# Altium PCB FS.PcbDoc
Units mil, origin at the board's own origin, x right, y up, seen from the top; angles counter-clockwise.
Board outline 4474 x 2728.38 mil, 2 copper layers (Top Layer, Bottom Layer); 32 components, 41 nets, 175 pads, 43 vias.
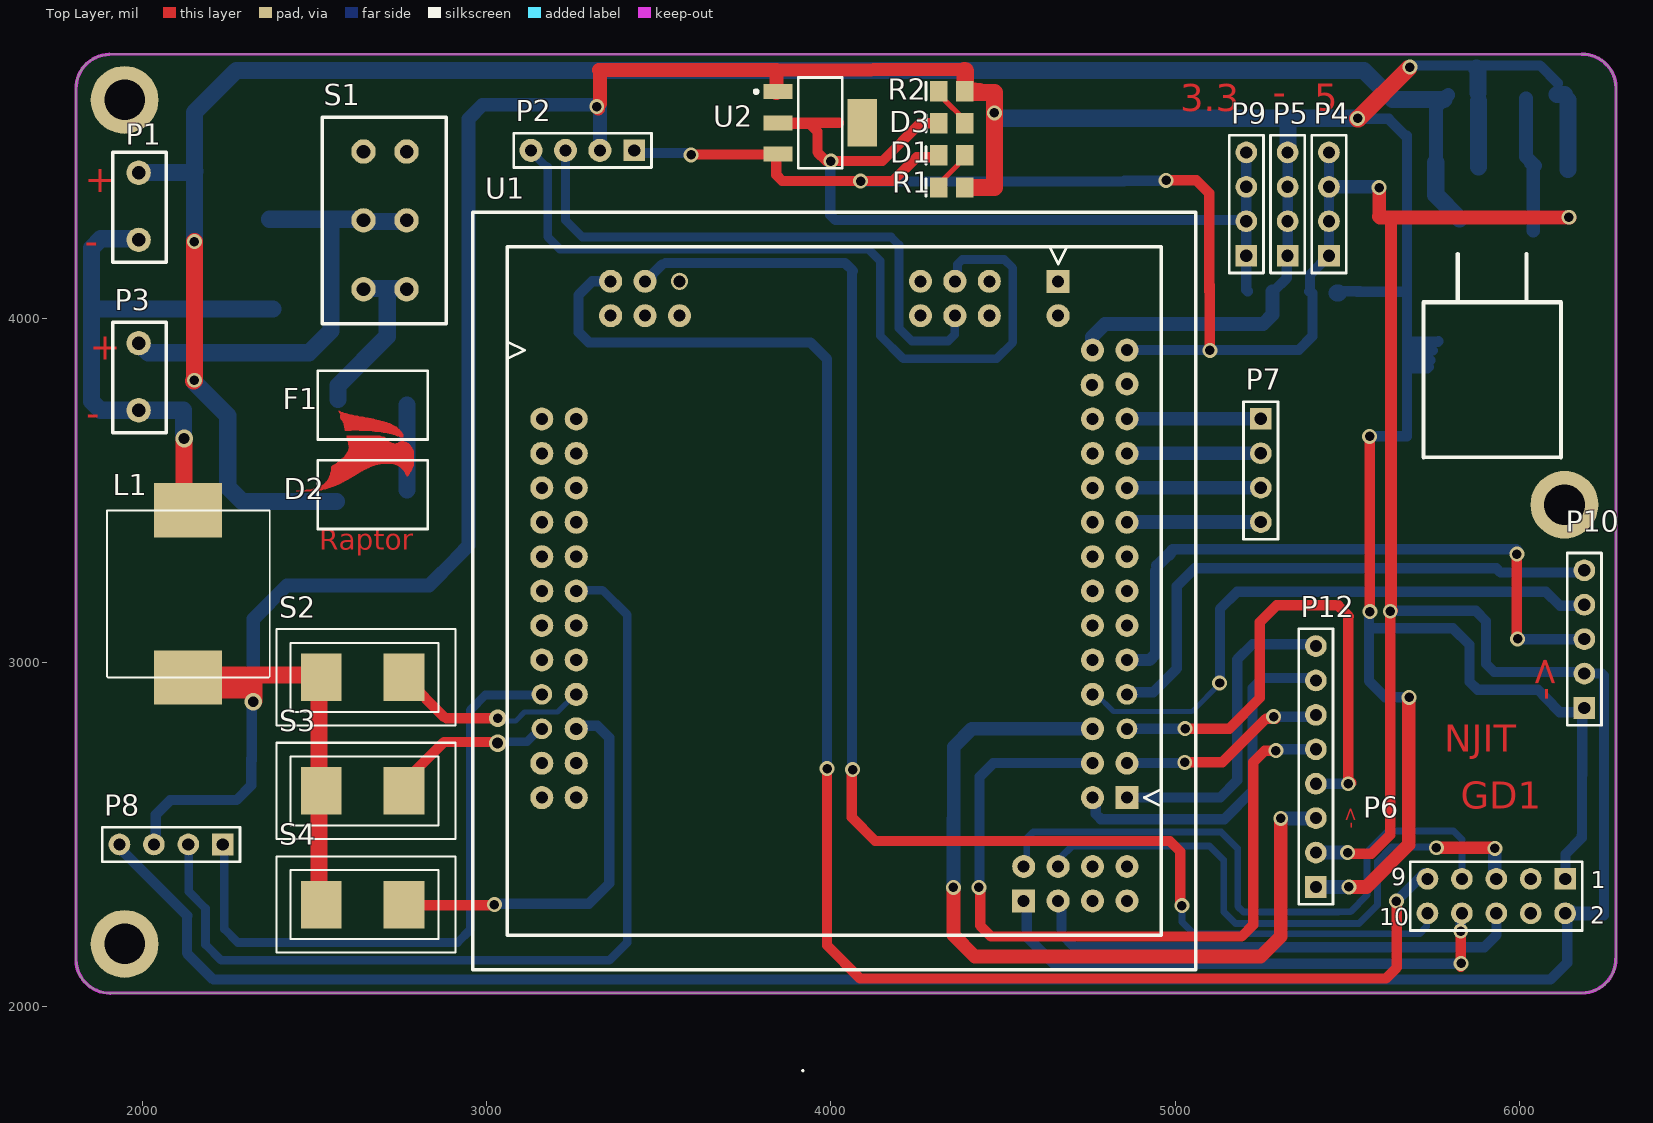
[diagram p0: Top Layer view]
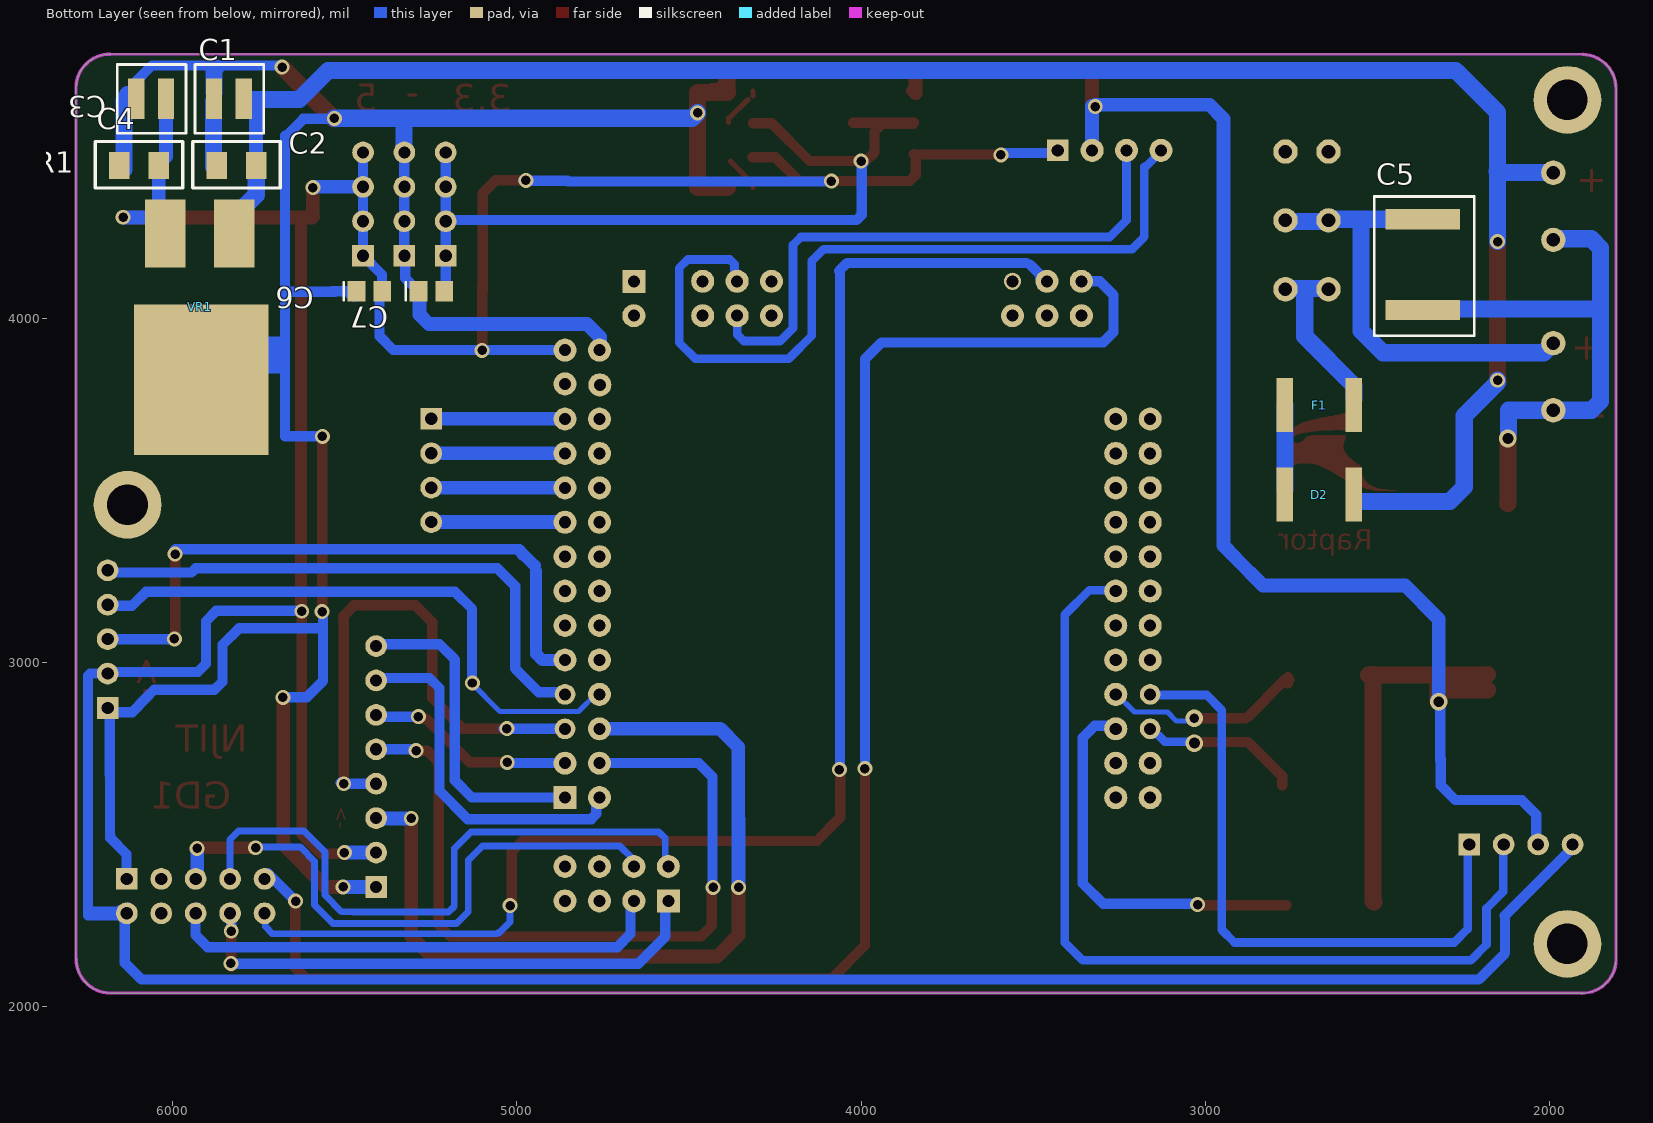
[diagram p1: Bottom Layer view, seen from below]

## Layer stack, top to bottom
Top Layer: signal copper 1.4
Dielectric: dielectric 12.6, FR-4, Dk 4.8
Bottom Layer: signal copper 1.4

## Board outline
1906.71,2040 cw(c1905.21,2138.5) 1806.71,2137 1806.71,4668 1806.71,4667.03 cw(c1905.21,4668.53) 1903.71,4767.03 6180.71,4768.38 6180.71,4768 cw(c6182.21,4669.5) 6280.71,4671 6280.71,2140.41 6280,2140.41 cw(c6181.5,2138.91) 6183,2040.41

## Design rules (kind name [scope] priority, off if disabled: settings)
Clearance [All] p1: gap=10
ComponentClearance [All] p1: gap=10 collisioncheckmode=3 verticalgap=0
PolygonConnect [All] p1: connectstyle=Relief reliefconductorwidth=10 reliefentries=4 polygonreliefangle="90 Angle"
RoutingVias [All] p1: holewidth=28 width=50 viastyle="Through Hole" minholewidth=28 minwidth=50 maxholewidth=28 maxwidth=50
SolderMaskExpansion [All] p1: expansion=4
TestPointUsage [All] p1: valid=0 allowmultiple=FALSE
Testpoint [All] p1: side=15 testpointundercomponent=TRUE minsize=40 maxsize=100 preferedsize=60 minholesize=0 maxholesize=40 preferedholesize=32 testpointgrid=1 style=1023 order=0123456789
Width [All] p1: maxlimit=100 minlimit=10 preferedwidth=40
18 further rules are at their usual default settings.

## Components (designator, comment, footprint, x,y, rotation, side; value= is the part's Value field where it differs from the comment)
C1 "Cap" 22uF钽电容 5835,4638 r180 bottom
C2 "Cap" 4.7UF钽电容 5872,4444 r180 bottom
C3 "Cap" 22uF钽电容 6061,4638 r180 bottom
C4 "Cap" 4.7UF钽电容 6155,4444 r180 bottom
C5 "Cap" 47UF钽电容 2368.71,4024.63 r90 bottom
C6 "Cap" C0805 5428.31,4079.41 r180 bottom
C7 "Cap" C0805 5248.31,4079.41 r180 bottom
D1 "LED0" C0805 4351.12,4473.75 r0 top
D2 "2A 60V" FUSE 2768.71,3488.41 r180 top
D3 "LED0" C0805 4351.12,4567.08 r0 top
F1 "Fuse 1" FUSE 2568.71,3748.41 r0 top
L1 "Inductor" 100uH 2370,3242 r270 top
P1 "Header 2H" 端子 1988.71,4318.41 r90 top
P2 "Header 4" HDR1X4#1 3428.71,4488.41 r180 top
P3 "Header 2H" 端子 1988.71,3823.41 r90 top
P4 "Header 4" HDR1X4#2 5446.71,4182.41 r90 top
P5 "Header 4" HDR1X4#2 5326.71,4182.41 r90 top
P6 "Header 5X2" HDR2X5 6133,2372 r180 top
P7 "Header 4" HDR1X4#2 5248.71,3708.41 r270 top
P8 "Header 4" HDR1X4#2 2233,2472 r180 top
P9 "Header 4" HDR1X4#2 5206.71,4182.41 r90 top
P10 "Header 5" HDR1X5 6188.71,2868.41 r90 top
P12 "Header 8" HDR1X8 5408.71,2348.41 r90 top
R1 "Res2" C0805 4351.12,4380.41 r0 top
R2 "Res2" C0805 4351.12,4660.41 r0 top
S1 "SW-SPDT" Rockey_Switch 2702,4285 r270 top
S2 "SW-PB" 白色按键 2759.71,2947.41 r180 top
S3 "SW-PB" 白色按键 2759.71,2617.41 r180 top
S4 "SW-PB" 白色按键 2759.71,2287.41 r180 top
U1 "MC9S12XS128" XS128接口 4010,3208 r270 top
U2 "AMS1117-3.3" SOT223 3968.71,4568.41 r270 top
VR1 "LM2940S" LM2940 5940.94,3762 r0 bottom

## Footprints (in the part's own frame and the unit in brackets; to place one, negate y for a bottom-side part, rotate by r counter-clockwise, add the part's x,y. Pads: shape width x height; smd on the part's side, far side on the other; paste and mask are expansions set on the pad)
4.7UF钽电容 [mm]
  rect 1.5x2 smd: 1(0,0) 2(2.921,0)
  silkscreen extent -1.78,-1.65 4.7,1.78
22uF钽电容 [mm]
  rect 1.2x3 smd: 1(-1.143,0) 2(1.067,0)
  silkscreen extent -2.54,-2.54 2.54,2.54
47UF钽电容 [mm]
  rect 1.5x5.5 smd: 1(0,0) 2(6.7,0)
  silkscreen extent -1.91,-3.81 8.38,3.56
100uH [mil]
  rect 157.48x196.85 smd: 1(-201,-238) 2(285,-238)
  silkscreen extent -201,-473 285,0
C0805 [mm] "Chip Capacitor; Body 2.0 x 1.2 mm (LxW typ)"
  rect 1.3x1.5 smd: 1(-0.95,0) 2(0.95,0)
  silkscreen extent -1.9,-0.65 -1.9,0.65
FUSE [mm]
  rect 1.2x4 smd far side: 1(0,0) 2(5.08,0)
  silkscreen extent -1.52,-2.54 6.6,2.54
HDR1X4#1 [mm] "Connector; Header; 4 Position"
  rect 1.6x1.6 hole 0.9: 1(0,0)
  round 1.7 hole 0.9: 2(2.54,0) 3(5.08,0) 4(7.62,0)
  silkscreen extent -1.27,-1.27 8.89,1.27
HDR1X4#2 [mm] "Connector; Header; 4 Position"
  rect 1.6x1.6 hole 0.9: 1(0,0)
  round 1.6 hole 0.9: 2(2.54,0) 3(5.08,0) 4(7.62,0)
  silkscreen extent -1.27,-1.27 8.89,1.27
HDR1X5 [mm] "Connector; Header; 5 Position"
  rect 1.6x1.6 hole 0.9: 1(0,0)
  round 1.6 hole 0.9: 2(2.54,0) 3(5.08,0) 4(7.62,0) 5(10.16,0)
  silkscreen extent -1.27,-1.27 11.43,1.27
HDR1X8 [mm] "Connector; Header; 8 Position"
  rect 1.6x1.6 hole 0.9: 1(0,0)
  round 1.6 hole 0.9: 2(2.54,0) 3(5.08,0) 4(7.62,0) 5(10.16,0) 6(12.7,0) 7(15.24,0) 8(17.78,0)
  silkscreen extent -1.27,-1.27 19.05,1.27
HDR2X5 [mm] "Connector; Header; 5x2 Position"
  rect 1.6x1.6 hole 0.9: 1(0,0)
  round 1.6 hole 0.9: 2(0,2.54) 3(2.54,0) 4(2.54,2.54) 5(5.08,0) 6(5.08,2.54) 7(7.62,0) 8(7.62,2.54) 9(10.16,0) 10(10.16,2.54)
  silkscreen extent -1.27,-1.27 11.43,3.81
LM2940 [mil]
  rect 118.11x196.85 smd: 1(-120,-485) 3(80,-485)
  rect 390.71x435.83 smd: 2(-23.94,-60)
Rockey_Switch [mm]
  round 1.8 hole 1: 1(-5.08,-1.524) 1(-5.08,1.651) 2(0,1.651) 2(0,-1.524) 3(5.08,-1.524) 3(5.08,1.651)
  silkscreen extent -7.62,-4.57 7.62,4.57
SOT223 [mm] "SOT-223/SC-73; 4 Leads; Body 6.7 x 7.3 mm, inc. leads (LxW max)"
  rect 1.1x2.15 smd: 1(-2.3,-3.1) 2(0,-3.1) 3(2.3,-3.1)
  rect 3.5x2.15 smd: 4(0,3.1)
  silkscreen extent -3.35,-4.85 3.35,1.62
XS128接口 [mm]
  round 1.7 hole 0.889: 6(-12.7,-19.05) 8(-10.16,-19.05) 9(-7.62,-21.59) 10(-7.62,-19.05) 11(-5.08,-21.59) 12(-5.08,-19.05) 13(-2.54,-21.59) 14(-2.54,-19.05) 15(0,-21.59) 16(0,-19.05) 17(2.54,-19.05) 18(2.54,-21.59) 19(5.08,-21.59) 20(5.08,-19.05) 22(7.62,-19.05) 24(10.16,-19.05) 25(12.7,-21.59) 26(12.7,-19.05) 27(15.24,-21.59) 28(15.24,-19.05) 38(20.32,13.97) 39(22.86,16.51) 40(20.32,16.51) 41(22.86,19.05) 42(20.32,19.05) 43(22.86,21.59) 44(20.32,21.59) 46(15.24,19.05) 47(12.7,21.59) 48(12.7,19.05) 50(10.16,19.05) 52(7.62,19.05) 53(5.08,21.59) 54(5.08,19.05) 55(2.54,21.59) 56(2.54,19.05) 57(0,21.59) 58(0,19.05) 59(-2.54,21.59) 60(-2.54,19.05) 61(-5.08,21.59) 62(-5.08,19.05) 63(-7.62,21.59) 64(-7.62,19.05) 65(-10.16,21.59) 66(-10.16,19.05) 67(-12.7,21.59) 68(-12.7,19.05) 69(-17.78,21.59) 70(-17.78,19.05) 71(-20.32,11.43) 72(-22.86,11.43) 73(-20.32,8.89) 74(-22.86,8.89) 75(-20.32,6.35) 76(-22.86,6.35) 89(-20.32,-11.43) 90(-22.86,-13.97) 91(-20.32,-13.97) 92(-22.86,-16.51) 93(-20.32,-16.51) 202(-20.32,16.51) 325(-15.291,21.59) 326(-15.215,19.025) " 5"(-12.7,-21.59) " 7"(-10.16,-21.59)
  round 1.524 hole 0.889 unplated paste+0: 21(7.62,-21.59)
  round 1.524 hole 0.889: 23(10.16,-21.59) 49(10.16,21.59) 51(7.62,21.59)
  rect 1.7x1.7 hole 0.889: 37(22.86,13.97) 45(15.24,21.59) 201(-22.86,16.51)
  round 1.27 hole 0.889: 223(-22.86,-11.43)
  silkscreen extent -27.94,-26.67 27.94,26.67
白色按键 [mm]
  rect 3x3.5 smd: 1(0,-0.254) 2(6.096,-0.254)
  silkscreen extent -3.81,-3.81 9.4,3.3
端子 [mm]
  round 1.8 hole 1: 1(-2.286,0) 2(2.667,0)
  silkscreen extent -3.94,-2.03 4.19,1.91

## Part data
C1 C2 C3 C4 C5 C6 C7: "Capacitor"
D1 D3: "Typical INFRARED GaAs LED"
D2: library part "Diode 1N4934", "1 Amp Fast Recovery Rectifier"
F1: "2A"
P1 P3: "Header, 2-Pin, Right Angle"
P2 P4 P5 P7 P8 P9: "Header, 4-Pin"
P6: "Header, 5-Pin, Dual row"
P10: "Header, 5-Pin"
P12: "Header, 8-Pin"
R1 R2: "Resistor"
S1: "SPDT Subminiature Toggle Switch, Right Angle Mounting, Vertical Actuation"
S2 S3 S4: "Switch"
VR1: library part "Volt Reg", "Voltage Regulator"

## Free pads (board coordinates)
  round 196.85 hole 118.11: 0(6131,3459) 1(1948,2183) 2(1948,4635)

## Via types
v1: diameter 43.31, hole 27.56, Top Layer to Bottom Layer, 39 vias
v2: diameter 51.18, hole 31.5, Top Layer to Bottom Layer, 3 vias
v3: diameter 51.18, hole 27.56, Top Layer to Bottom Layer, 1 vias

## Nets (pads, with @x,y where several pads share a name; then routed paths per layer and width w, separated by ;. In a path a pad name is that pad's centre, name@x,y a point inside that pad or via, vN(x,y) a via of type N, cw(c..) or ccw(c..) an arc to the next point about the centre after c; other vN are vias at no path point)
3.3V: C7.2 D3.1 P9.1 P9.2 P9.3 P9.4 U2.2 | length 2553.7
  Top Layer w30: U2.2 3849.67,4565.41 3938.71,4565.41 3960.71,4543.41 3960.71,4483.41 3986.71,4457.41 v1(3999.71,4457.41) 4149.71,4457.41 4259.38,4567.08 D3.1 ; U2.2@3847,4569 4023.44,4569
  Bottom Layer w30: v1@3993.71,4451.41 3997.71,4447.41 3997.71,4301.41 4013.21,4285.91 P9.2@5206.71,4285.91 ; P9.4 P9.3 P9.2@5206.71,4285.91 ; C7.2 5206.71,4083.61 P9.1 P9.2 P9.2@5206.71,4285.91 ; P9.2@5216.71,4281.41 5212.21,4285.91 P9.2@5206.71,4285.91
5V: C3.2 C4.2 C6.2 D1.1 P2.1 P4.1 P4.2 P4.3 P4.4 P6.2 P8.4 P10.2 P12.2 U1.69 U2.3 VR1.3 | length 13133
  Top Layer w30: v1(3593.71,4475.41) 3594.71,4476.41 U2.3@3843.71,4476.41 ; U2.3 3840.71,4471.91 3840.71,4417.41 3858.71,4399.41 v1(4086,4399) 4179.71,4399.41 4248.71,4468.41 4313.71,4468.41 D1.1@4314.71,4468.41 ; v1(4973.71,4401.41) 5061.71,4401.41 5098.71,4364.41 5098.71,4079.41 ; v1@5100,3908 5100,4097 ; v1(5500.71,2448.41) 5503.71,2445.41 5569.71,2445.41 5624.71,2500.41 v1@5624.71,3148
  Top Layer w35: v1@5627,3151 5627,4292
  Top Layer w40: 5592,4296 5595,4293 6144,4293 v1@6146,4293 ; 5592.71,4296 v1(5592.71,4380.41) ; v1@5624,3148 5625.06,3149.06 v1@5627,3151
  Bottom Layer w30: P8.4 1933,2462 2130,2265 ; 2129,2265 2129,2156.41 2206,2079.41 6089.71,2079.41 6138.71,2128.41 6138.71,2271 6138.71,2272 6138.71,2278.41 P6.2@6128.71,2288.41 ; P2.1@3436.49,4480.64 3588.49,4480.64 v1(3593.71,4475.41) ; v1@4089,4398 4851,4398 ; 4853,4400 4973.71,4400 4980,4400 v1@4981,4401 ; U1.69@4868.71,3908.41 5101,3908.41 5358.71,3908.41 5398.71,3948.41 5398.71,4073.41 5391.81,4080.31 5391.71,4080.41 5391.71,4127.41 P4.1 P4.2 P4.3 P4.4 ; C6.2@5389.71,4078.22 C6.2 ; v1@5624.71,3151 5873,3151 5903,3121 5903,2997 5927,2973 6188.71,2973 6190,2973 6191.65,2971.35 P10.2@6194,2969 ; P6.2@6153,2276 P6.2@6153,2281 ; P10.2 6239.79,2968.41 6245.79,2962.41 6245.79,2266
  Bottom Layer w40: P12.2 v1(5500.71,2448.41) ; P4.3 v1@5590.71,4382.41 ; C3.2@6019,4640 C3.2 6019,4470 6042.5,4446.5 C4.2@6045,4444 ; VR1.3@6033,4293 VR1.3@6040,4293 ; C4.2@6033,4451 C4.2 VR1.3@6040,4293 ; VR1.3@6040,4255 VR1.3@6040,4293 ; P6.2@6130,2271 6133,2271 6138.71,2271 6236.41,2271 ; v1@6140,4294 6139,4293 VR1.3@6040,4293
  other v1: 5624.71,3149.41 5101,3907 6144,4294
7.2V: C5.2 P3.2 S1.2 | length 1320.2
  Top Layer w50: S1.2@2639,4286 S1.2@2639,4291
  Bottom Layer w50: P3.2 2016.71,3900.41 2483.71,3900.41 2547.71,3964.41 2547.71,4288.41 ; C5.2 2547.71,4288.41 ; S1.2@2652,4282 2760,4282 S1.2@2762,4280 ; S1.2@2652,4288.41 2642,4288.41 2547.71,4288.41
AD0: P10.3 U1.53 | length 1862.3
  Top Layer w30: v1(5992.71,3315.41) 5992.71,3071.41 v1(5994.71,3069.41)
  Bottom Layer w30: 4984,3312 4997,3330 5991.71,3330 v1@5995,3326 ; v1@5990.71,3313.41 v1(5992.71,3315.41) ; v1(5994.71,3069.41) 5995.71,3068.41 P10.3
  Bottom Layer w35: U1.53 4926,3008 4944,3026 4944,3267 ; 4948,3282 4993,3327
AD1: U1.55
AD2: U1.57
AD3: U1.59
AD4: P7.4 U1.61 | length 380
  Bottom Layer w40: U1.61@4868.71,3408.41 P7.4
AD5: P7.3 U1.63 | length 380
  Bottom Layer w40: U1.63@4868.71,3508.41 P7.3
AD6: P7.2 U1.65 | length 380
  Bottom Layer w40: U1.65@4868.71,3608.41 P7.2
AD7: P7.1 U1.67 | length 380
  Bottom Layer w40: U1.67@4868.71,3708.41 P7.1
GND: C1.1 C2.1 C3.1 C4.1 C6.1 C7.1 L1.2 P2.2 P5.1 P5.2 P5.3 P5.4 P6.1 P8.3 P10.1 P12.1 R1.2 R2.2 S2.2 S3.2 S4.2 U1.70 U2.1 VR1.2 | length 14328.9
  Top Layer w30: U2.1@3852.71,4663.41 U2.1@3854.71,4661.41 ; R2.2@4401.71,4671.41 R2.2@4401.71,4675.41 ; v1(5564.71,3657.41) 5565.71,3656.41 v1(5565.71,3148.41)
  Top Layer w40: v1@3324,4609 v1@3324,4615.41 ; 3326,4722 3830,4722 ; v1@3329,4624 3329,4719.59 ; U2.1@3841,4654 3842,4655 3842,4658.96 3842,4722 ; 3845,4721 4394,4724 ; v1(5504.71,2348.41) 5555.71,2348.41 5678.71,2471.41 v1@5678.71,2899.41
  Top Layer w50: L1.2@2180,2921 2303,2921 ; L1.2@2180,2966 2181.59,2964.41 S2.2@2512.71,2964.41 ; v2@2323.71,2888.41 2323.71,2963.41 ; S4.2@2509.71,2304.41 2511.21,2305.91 2512.71,2307.41 2512.71,2627.41 2512.71,2957.41 S2.2@2512.71,2964.41 ; S2.2@2512.71,2965.41 S2.2@2512.71,2964.41 ; S2.2@2525.71,2964.41 2519.71,2964.41 S2.2@2512.71,2964.41 ; 4388,4720 4390,4718 4390,4660.41 R2.2@4390,4657 ; R1.2 4474.71,4380.41 v1(4474.71,4597.41) 4474.71,4656.41 4388.52,4656.41 R2.2 ; R2.2@4394,4663.41 4431,4659 ; v1@5530,4580 5532,4580 v1@5678,4726
  Bottom Layer w30: P8.3 P8.3@2037,2476 ; P8.3@2036,2480 2038,2482 2038,2558 2081,2601 2273,2601 2316,2644 2316,2721 ; v2@2314,2886.41 v2@2314,2891 ; v2@2314,2895 v2@2314,2891 ; 2317,2716 2317,2886.41 2317,2888 v2@2314,2891 ; v2@2327.71,2892.41 v2@2330.71,2895.41 ; P2.2@3320.71,4476.41 P2.2@3320.71,4488.41 ; U1.70@4768.71,3908.41 U1.70@4768.71,3926.41 ; C7.1@5283.71,4077.41 C7.1 5323.71,4117.41 5323.71,4179.41 P5.1 P5.2 P5.3 P5.4 ; C6.1@5470.71,4074.41 C6.1 5536.71,4079.41 ; v1@5527,4580 5529.71,4580 5621,4580 ; 5528,4078 5672,4078 ; v1@5563,3149 5563,3148.41 5563,3100 ; v1@5563.71,3146.41 v1(5565.71,3148.41) ; v1(5564.71,3657.41) 5672.71,3657.41 5673.71,3658.41 5673.71,4529.29 ; 5622,4577 5668,4531 5673,4531 ; 5678,3855 5733,3855 VR1.2@5737,3859 ; 5678,3932 5763,3932 VR1.2@5765,3934 ; v1@5682,2898 5680.15,2899.85 5680,2900 5679.71,2900 5610,2900 5563,2947 5563,3100 ; 5682,3883 5737,3883 VR1.2@5741,3879 ; 5685,3908 5747,3908 VR1.2@5748,3907 ; v1@5692,4735 6046.72,4735 ; 6048,4735 6060,4735 C3.1@6112,4683 ; 6076.56,2897.56 6117.71,2856.41 P10.1@6188.71,2856.41 ; 6077,2898 6054,2921 5879,2921 5855,2945 5855,3052 5807,3100 5563,3100 ; P6.1@6134,2366 6134,2372 6134,2444 6181,2491 6181,2498 6182,2499 6182,2683 ; 6182.71,2674.41 6182.71,2850.41 P10.1@6188.71,2856.41 ; P10.1@6195.71,2856.41 P10.1@6188.71,2856.41
  Bottom Layer w40: v2@2322,2880 2322,2886.41 2322,3127 2419,3224 2832,3224 2913,3305 2913,3306 2947,3340 2947,4580 2988,4621 3319,4621 v1@3321,4619 ; v1@3328,4618 3329,4617 3329,4615.41 3329,4488.41 P2.2@3329,4479 ; U1.70@4758,3906 4758,3908 4758,3946 4796,3984 5256,3984 5283,4011 5283,4077 C7.1@5282,4078 ; P12.1 v1(5504.71,2348.41)
  Bottom Layer w50: v1(4474.71,4597.41) 4490.71,4581.41 v1(5529.71,4581.41) ; P5.4 5327.71,4483.41 5327.71,4553.41 ; C6.1@5470.71,4074.41 C6.1@5473.71,4074.41 ; 5875,4727 5880,4722 C1.1@5880,4656 ; C2.1@5881,4441 5881,4444 C1.1@5881,4632 ; C3.1@6110,4651 6131,4651 ; C4.1@6141,4433 6141,4444 6141,4634
  other v1: 5679.71,2899.41 3319.71,4615.41 5682,4730
  other v2: 2321.71,2886.41
NetD1_2: D1.2 R1.1 | length 104.3
  Top Layer w15: R1.1 4313.71,4391.41 D1.2@4379.71,4457.41
NetD2_1: D2.1 F1.2 | length 246
  Bottom Layer w50: D2.1@2768.71,3502.41 F1.2
NetD3_2: D3.2 R2.1 | length 104.8
  Top Layer w15: R2.1@4313.71,4646.41 R2.1 ; R2.1@4328.71,4636.41 D3.2@4383.71,4581.41 ; D3.2@4384.71,4569.41 D3.2@4384.71,4582.41
NetF1_1: F1.1 S1.3 | length 498.7
  Bottom Layer w50: F1.1@2568,3765 2568,3805 2711,3948 2711,4070 2712,4071 ; S1.3@2638,4087 2642,4087 2764,4087 2766.5,4084.5 S1.3@2769,4082
PA0: P12.8 U1.45 | length 955.5
  Bottom Layer w30: U1.45@4868.71,2608.41 5130.71,2608.41 5180.71,2658.41 5180.71,3009.41 5224.71,3053.41 P12.8@5403.71,3053.41 ; P12.8@5397.71,3059.41 P12.8@5403.71,3053.41 ; P12.8 P12.8@5403.71,3053.41 ; P12.8@5418.71,3053.41 5408.71,3053.41 P12.8@5403.71,3053.41
PA1: P12.7 U1.46 | length 1025.3
  Bottom Layer w30: U1.46@4769.71,2593.41 4769.71,2560.41 4783.71,2546.41 ; 4783,2545 5143,2545 ; 5143.71,2546.41 5224.71,2627.41 5224.71,2926.41 5253.71,2955.41 5401.71,2955.41 P12.7
PA2: P12.6 U1.47 | length 591.7
  Top Layer w30: v1(5027.71,2710.41) 5136.71,2710.41 5263.71,2837.41 5285.71,2837.41 v1@5290.71,2837.41
  Bottom Layer w30: U1.47@4868.71,2708.41 v1@5019.71,2708.41 ; v1(5285.71,2843.41) 5403.71,2843.41 P12.6
PA3: P12.5 U1.48 | length 2265.2
  Top Layer w30: v1@4433.71,2336.41 4433.71,2236.41 4465.71,2204.41 5192.71,2204.41 5226.71,2238.41 5226.71,2711.41 5259.71,2744.41 v1(5292.71,2744.41)
  Bottom Layer w30: v1@4431.71,2347.41 4431.71,2668.41 4471.71,2708.41 4760,2708.41 U1.48@4768.71,2708.41 ; v1(5292.71,2744.41) 5296.71,2748.41 P12.5
  other v1: 4429.71,2347.41
PA4: P12.4 U1.49 | length 1518.7
  Top Layer w30: v1(5028.71,2808.41) 5156.71,2808.41 5245.71,2897.41 5245.71,3117.41 5294.71,3166.41 5473.71,3166.41 5473.71,3165.41 5504.71,3134.41 ; v1(5502.71,2648.41) 5502.71,3125.41 ; v1@5510.71,2652.41 v1@5511.71,2651.41
  Bottom Layer w30: U1.49@4868.71,2808.41 v1(5028.71,2808.41) v1@5037.71,2808.41 ; P12.4 v1(5502.71,2648.41) 5508.71,2648.41 v1@5511.71,2651.41
PA5: P12.3 U1.50 | length 2427.1
  Top Layer w40: v1(4355.71,2347.41) 4355.71,2208.41 4417.71,2146.41 5248.71,2146.41 5306.71,2204.41 v1(5306.71,2547.41)
  Bottom Layer w40: v1(4355.71,2347.41) 4356.71,2755.41 4409.71,2808.41 4760,2808.41 U1.50@4768.71,2808.41 ; v1(5306.71,2547.41) 5407.71,2547.41 P12.3
PA6: P10.5 U1.51 | length 1620
  Bottom Layer w20: P10.5@6186.71,3266.41 P10.5
  Bottom Layer w30: U1.51@4871,2914 4936,2914 5005,2983 5005,3222 5057,3274 5933,3274 5945,3262 6187,3262 6191.06,3266.06 P10.5@6192,3267
PA7: P10.4 U1.52 | length 1746.4
  Bottom Layer w15: U1.52@4768.71,2908.41 4770.71,2908.41 4820.71,2858.41 5046.71,2858.41 ; 5051,2860 5130.5,2939.5 v1@5132.56,2941.56 ; v1@5131.56,2937.56 v1@5132,2938
  Bottom Layer w20: P10.4@6183.71,3163.41 6185.3,3165 6186.3,3166 P10.4
  Bottom Layer w25: P10.4@6186.3,3166 6188.71,3166 6191,3166 P10.4@6192,3165
  Bottom Layer w30: v1@5130,2941 5130,3156 5180,3206 6077,3206 6118,3165 6185.3,3165 6188.71,3165 6192,3165 6193,3165 P10.4@6195,3167
  other v1: 5129,2941
PB0: P8.1 U1.21 | length 1895.3
  Bottom Layer w15: P8.1@2224.71,2463.71 P8.1 ; U1.21@3156,2912 U1.21@3160,2912 ; U1.21@3158,2906 3160,2906 U1.21@3179,2906
  Bottom Layer w25: P8.1@2238,2476 2238,2472 2238,2226 2277,2187 2915,2187 2952,2224 2952,2862 2996,2906 3156,2906 U1.21@3158,2908
PB1: S2.1 U1.22 | length 594.1
  Top Layer w30: S2.1@2756,2950 S2.1@2759.71,2946.29 ; S2.1@2759.71,2939.41 S2.1@2759.71,2946.29 ; S2.1 S2.1@2759.71,2946.29 ; S2.1@2767.71,2951.29 2877,2842 ; 2884,2839 v3(3032,2839) v3@3036,2839
  Bottom Layer w15: v3@3030,2845 3032,2845 v3@3036,2845 ; v3@3052,2831 3084,2831 3110,2857 3206,2857 3257,2908 U1.22@3258,2908 ; U1.22@3263,2902 U1.22@3263,2906 ; U1.22@3263.15,2904.85 U1.22@3271.71,2913.41
  Bottom Layer w30: v3@3036,2845 3037,2844 v3@3039,2842
PB2: S3.1 U1.23 | length 482.9
  Top Layer w30: S3.1@2776.71,2643.41 2776.71,2670.41 2875.71,2769.41 v2@3031.71,2769.41
  Bottom Layer w25: v2@3024,2770 3031.71,2770 3117,2770 3157.5,2810.5 3160,2813 U1.23@3160,2812 ; v2@3027.36,2772.64 3029,2771 v2@3031.71,2771
  other v2: 3031.71,2766.41
PB3: S4.1 U1.24 | length 1164.4
  Top Layer w30: S4.1@2765,2295 3021,2295 3022.5,2296.5 v1@3023,2297
  Bottom Layer w30: v1@3019,2300 3022,2300 3297,2300 3355.5,2358.5 3355.5,2782.5 3321,2817 3260,2817 3256,2817 3253.5,2814.5 U1.24@3251,2812
  other v1: 3022,2297
PGND: C5.1 L1.1 P1.1 P3.1 | length 1662.4
  Top Layer w50: v2(2120.71,3651.41) 2120.71,3462.41 L1.1@2121.71,3462.41
  Bottom Layer w50: P1.1 1985.71,4231.41 1878.71,4231.41 1851.71,4204.41 1851.71,4012.41 ; v2@2118.71,3666.41 2118.71,3733.41 P3.1 1877.71,3733.41 1851.71,3759.41 1851.71,4012.41 ; C5.1@2378.71,4027.41 2368.71,4027.41 1866.71,4027.41 1851.71,4012.41
PH0: P6.5 U1.40 | length 1735.8
  Top Layer w35: v1(5758.71,2462.41) v1@5926.71,2462.41
  Bottom Layer w20: U1.40@4666,2404 4666,2408 4666,2433 4701,2468 5100,2468 5141,2427 5141,2277 5175.59,2242.41 5534.41,2242.41 5588,2296 5588,2423 5629,2464 ; 5628,2465 5758.71,2465 5759,2465 5760.15,2463.85 v1@5761,2463
  Bottom Layer w40: P6.5@5928.71,2380.41 v1(5928.71,2460.41)
PH1: P6.6 U1.39 | length 1484.1
  Bottom Layer w30: U1.39@4669.71,2320.41 4669.71,2308 4669.71,2212.41 4708.71,2173.41 5897.71,2173.41 5933.71,2209.41 5933.71,2272 5933.71,2283.41 P6.6@5928.71,2288.41
PH2: P6.7 U1.38 | length 1826.8
  Bottom Layer w20: U1.38@4568.71,2408.41 4568.71,2489.41 4587.71,2508.41 5133.71,2508.41 5181.71,2460.41 5181.71,2292.41 5198.71,2275.41 5474.71,2275.41 ; 5477.71,2276.41 5508.71,2276.41 5557.71,2325.41 5557.71,2450.41 5618.71,2511.41 5808.71,2511.41 5833.71,2486.41 5833.71,2393.41 P6.7@5828.71,2388.41
PH3: P6.8 U1.37 | length 1567.5
  Top Layer w30: v1@5829.71,2116.41 5829.71,2126.41 v1(5829.71,2220.41)
  Bottom Layer w30: U1.37@4568.71,2308.41 4568.71,2308 4568.71,2204.41 4647.71,2125.41 5820.71,2125.41 v1@5825.21,2120.91 ; P6.8@5828.71,2288.41 5829.71,2287.41 5829.71,2272 v1(5829.71,2220.41)
  other v1: 5830.71,2126.41
PP5: P6.9 U1.92 | length 4704.9
  Top Layer w30: v1(3988.71,2692.41) 3988.71,2178.41 4084.71,2082.41 5611.71,2082.41 5643.71,2114.41 v1@5643.71,2307.41
  Bottom Layer w30: U1.92@3368.71,4108.41 3360,4108.41 3306.71,4108.41 3266.71,4068.41 3266.71,3960.41 3296.71,3930.41 3939.71,3930.41 3988.71,3881.41 v1(3988.71,2692.41) ; v1(5642.71,2307.41) 5720.15,2384.85 5723.71,2388.41 P6.9@5728.71,2388.41
PP7: P6.10 U1.90 | length 4204.9
  Top Layer w30: v1@4060,2685 4060,2551 4129,2482 4984,2482 5015.5,2450.5 ; 5014,2448 5015,2447 v1@5015,2297
  Bottom Layer w20: U1.90 U1.90@3468.71,4108 ; U1.90@3468.71,4108.41 U1.90@3471.71,4108.41 ; U1.90@3480.71,4108.41 U1.90@3480.71,4118.41 ; v1(5019.71,2294.41) 5019.71,2246.41 5049.71,2216.41 5053.71,2216.41 5057.71,2212.41 5709.71,2212.41 5730.71,2233.41 5730.71,2272 5730.71,2286.41 P6.10@5728.71,2288.41
  Bottom Layer w30: U1.90@3462,4109 3509,4156 ; U1.90@3468.71,4106.41 3468.71,4108 U1.90@3468.71,4108.41 ; 3520,4161 4041,4161 4064,4138 ; v1@4061,2696 4061,4135
  Bottom Layer w40: U1.90@3472,4118 U1.90@3474,4118
  other v1: 4062.71,2689.41
PS0: P2.3 U1.73 | length 1687.7
  Bottom Layer w25: P2.3 3228.71,4285.41 3277.42,4236.7 4174.42,4236.7 4197.71,4213.41 4197.71,3971.41 4234.71,3934.41 4340.71,3934.41 4359.71,3953.41 4359.71,3999.41 4364.15,4003.85 U1.73@4368.71,4008.41
PS1: P2.4 U1.74 | length 2358.6
  Bottom Layer w25: P2.4@3116,4495 P2.4@3125.65,4485.35 ; P2.4@3132.65,4481.35 3171,4443 ; 3176.71,4440 3176.71,4237.41 3212.71,4201.41 4108.71,4201.41 4142.71,4167.41 4142.71,3950.41 4210.13,3883 4481.3,3883 4528.71,3930.41 4528.71,4146.41 4503.71,4171.41 4381.71,4171.41 4367.71,4157.41 4367.71,4109.41 U1.74@4368.71,4108.41
PS2: U1.75
PS3: U1.76
PT7: P8.2 U1.16 | length 2732.7
  Bottom Layer w15: U1.16@3255,3210 3260,3210 U1.16@3270,3210
  Bottom Layer w25: P8.2@2134,2476 2134,2472 2134,2335.25 2183,2286.25 2183,2181 2229,2135 3356,2135 3408,2187 3408,3139 3336,3211 3260,3211 U1.16@3253,3211
V1: C1.2 C2.2 D2.2 P1.2 VR1.1 | length 5750.9
  Top Layer w50: v1@2148.71,3818.41 v1(2150.71,3820.41) v1(2150.71,4223.41)
  Bottom Layer w40: C2.2@5758,4451 5758,4614 C1.2@5780,4636 ; C1.2@5781,4637 5787.5,4643.5 C1.2@5793,4649
  Bottom Layer w50: P1.2 1987.71,4424.41 1988.71,4424.41 2149.71,4424.41 2150.71,4425.41 ; v1(2150.71,3820.41) 2150.71,3814.41 2247.71,3717.41 2247.71,3510.41 2289.71,3468.41 D2.2@2563.71,3468.41 ; v1(2150.71,4223.41) 2150.71,4425.41 ; 2152.71,4427.41 2150.71,4425.41 ; C2.2@5757,4453 C2.2 5757,4359 VR1.1@5826,4290 ; C1.2@5781,4637 5780,4636 5632,4636 5547.59,4720.41 2272.71,4720.41 2150.71,4598.41 2150.71,4425.41
pads on no net: "U1. 5" "U1. 7" P6.3 P6.4 S1.1 U1.6 U1.8 U1.9 U1.10 U1.11 U1.12 U1.13 U1.14 U1.15 U1.17 U1.18 U1.19 U1.20 U1.25 U1.26 U1.27 U1.28 U1.41 U1.42 U1.43 U1.44 U1.54 U1.56 U1.58 U1.60 U1.62 U1.64 U1.66 U1.68 U1.71 U1.72 U1.89 U1.91 U1.93 U1.201 U1.202 U1.223 U1.325 U1.326 U2.4
copper on no net: | length 26791
  Top Layer w1: 2447,3500 2506,3500 ; 2448,3499 2501,3499 ; 2469,3501 2514,3501 ; 2475,3502 2517,3502 ; 2487,3503 2520,3503 ; 2492,3504 2524,3504 ; 2496,3505 2529,3505 ; 2500,3506 2533,3506 ; 2503,3507 2536,3507 ; 2506,3508 2539,3508 ; 2510,3509 2542,3509 ; 2512,3510 2546,3510 ; 2514,3511 2548,3511 ; 2517,3512 2551,3512 ; 2519,3513 2554,3513 ; 2520,3514 2557,3514 ; 2521,3515 2559,3515 ; 2523,3516 2562,3516 ; 2524,3517 2564,3517 ; 2526,3518 2567,3518 ; 2527,3519 2569,3519 ; 2528,3520 2571,3520 ; 2529,3521 2573,3521 ; 2530,3522 2575,3522 ; 2531,3523 2577,3523 ; 2532,3524 2579,3524 ; 2533,3525 2581,3525 ; 2534,3526 2583,3526 ; 2535,3527 2585,3527 ; 2536,3528 2587,3528 ; 2537,3529 2588,3529 ; 2537,3530 2590,3530 ; 2538,3531 2592,3531 ; 2538,3532 2594,3532 ; 2539,3533 2596,3533 ; 2540,3534 2598,3534 ; 2540,3535 2599,3535 ; 2541,3536 2601,3536 ; 2541,3537 2603,3537 ; 2542,3538 2604,3538 ; 2542,3539 2606,3539 ; 2543,3540 2608,3540 ; 2543,3541 2609,3541 ; 2544,3542 2611,3542 ; 2544,3543 2613,3543 ; 2544,3544 2614,3544 ; 2545,3545 2616,3545 ; 2545,3546 2618,3546 ; 2545,3547 2619,3547 ; 2546,3548 2621,3548 ; 2546,3549 2623,3549 ; 2546,3550 2624,3550 ; 2546,3551 2626,3551 ; 2546,3552 2628,3552 ; 2547,3553 2629,3553 ; 2547,3554 2631,3554 ; 2547,3555 2632,3555 ; 2548,3556 2634,3556 ; 2548,3557 2636,3557 ; 2548,3558 2638,3558 ; 2548,3559 2640,3559 ; 2548,3560 2642,3560 ; 2548,3561 2643,3561 ; 2548,3562 2645,3562 ; 2548,3563 2647,3563 ; 2549,3564 2650,3564 ; 2549,3565 2652,3565 ; 2549,3566 2654,3566 ; 2549,3567 2656,3567 ; 2549,3568 2658,3568 ; 2549,3569 2660,3569 ; 2550,3570 2662,3570 ; 2550,3571 2664,3571 ; 2551,3572 2667,3572 ; 2553,3573 2670,3573 ; 2555,3574 2673,3574 ; 2556,3575 2676,3575 ; 2559,3576 2680,3576 ; 2560,3577 2684,3577 ; 2562,3578 2690,3578 ; 2563,3579 2694,3579 ; 2564,3580 2788,3580 ; 2565,3581 2788,3581 ; 2566,3582 2788,3582 ; 2567,3583 2788,3583 ; 2569,3584 2788,3584 ; 2570,3585 2788,3585 ; 2570,3730 2574,3730 ; 2570,3731 2573,3731 ; 2570,3732 2572,3732 ; 2571,3586 2788,3586 ; 2571,3729 2576,3729 ; 2572,3587 2788,3587 ; 2572,3727 2582,3727 ; 2572,3728 2579,3728 ; 2573,3588 2788,3588 ; 2573,3726 2584,3726 ; 2574,3589 2788,3589 ; 2574,3712 2651,3712 ; 2574,3713 2646,3713 ; 2574,3714 2641,3714 ; 2574,3715 2636,3715 ; 2574,3716 2628,3716 ; 2574,3717 2625,3717 ; 2574,3725 2588,3725 ; 2575,3711 2656,3711 ; 2575,3718 2619,3718 ; 2575,3719 2614,3719 ; 2575,3723 2596,3723 ; 2575,3724 2592,3724 ; 2576,3590 2788,3590 ; 2576,3709 2667,3709 ; 2576,3710 2664,3710 ; 2576,3720 2609,3720 ; 2576,3721 2604,3721 ; 2576,3722 2600,3722 ; 2577,3591 2788,3591 ; 2577,3708 2672,3708 ; 2578,3592 2788,3592 ; 2578,3707 2675,3707 ; 2579,3706 2680,3706 ; 2580,3593 2788,3593 ; 2580,3704 2688,3704 ; 2580,3705 2685,3705 ; 2581,3594 2788,3594 ; 2581,3702 2696,3702 ; 2581,3703 2692,3703 ; 2582,3595 2788,3595 ; 2582,3700 2704,3700 ; 2582,3701 2700,3701 ; 2583,3596 2788,3596 ; 2583,3698 2709,3698 ; 2583,3699 2707,3699 ; 2584,3695 2719,3695 ; 2584,3696 2715,3696 ; 2584,3697 2713,3697 ; 2585,3597 2788,3597 ; 2585,3691 2726,3691 ; 2585,3692 2724,3692 ; 2585,3693 2722,3693 ; 2585,3694 2720,3694 ; 2586,3598 2788,3598 ; 2586,3599 2788,3599 ; 2586,3684 2739,3684 ; 2586,3685 2738,3685 ; 2586,3686 2736,3686 ; 2586,3687 2734,3687 ; 2586,3688 2732,3688 ; 2586,3689 2730,3689 ; 2586,3690 2728,3690 ; 2587,3600 2788,3600 ; 2587,3678 2746,3678 ; 2587,3679 2745,3679 ; 2587,3680 2743,3680 ; 2587,3681 2742,3681 ; 2587,3682 2741,3682 ; 2587,3683 2740,3683 ; 2588,3601 2788,3601 ; 2588,3677 2747,3677 ; 2589,3602 2788,3602 ; 2589,3676 2606,3676 ; 2590,3603 2788,3603 ; 2590,3604 2788,3604 ; 2591,3605 2788,3605 ; 2592,3606 2788,3606 ; 2592,3607 2788,3607 ; 2593,3608 2788,3608 ; 2593,3652 2707,3652 ; 2593,3653 2706,3653 ; 2593,3654 2705,3654 ; 2593,3655 2704,3655 ; 2593,3656 2702,3656 ; 2593,3657 2700,3657 ; 2593,3658 2694,3658 ; 2594,3609 2788,3609 ; 2594,3610 2788,3610 ; 2594,3649 2710,3649 ; 2594,3650 2709,3650 ; 2594,3651 2708,3651 ; 2594,3659 2691,3659 ; 2595,3611 2788,3611 ; 2595,3612 2788,3612 ; 2595,3646 2713,3646 ; 2595,3647 2712,3647 ; 2595,3648 2710,3648 ; 2596,3613 2788,3613 ; 2596,3614 2788,3614 ; 2596,3643 2716,3643 ; 2596,3644 2715,3644 ; 2596,3645 2714,3645 ; 2597,3615 2788,3615 ; 2597,3616 2787,3616 ; 2597,3639 2724,3639 ; 2597,3640 2721,3640 ; 2597,3641 2720,3641 ; 2597,3642 2718,3642 ; 2598,3617 2787,3617 ; 2598,3618 2786,3618 ; 2598,3619 2786,3619 ; 2598,3635 2774,3635 ; 2598,3636 2773,3636 ; 2598,3637 2730,3637 ; 2598,3638 2726,3638 ; 2599,3620 2785,3620 ; 2599,3621 2784,3621 ; 2599,3622 2784,3622 ; 2599,3623 2783,3623 ; 2599,3624 2783,3624 ; 2599,3625 2782,3625 ; 2599,3629 2779,3629 ; 2599,3630 2779,3630 ; 2599,3631 2778,3631 ; 2599,3632 2777,3632 ; 2599,3633 2777,3633 ; 2599,3634 2776,3634 ; 2600,3626 2782,3626 ; 2600,3627 2781,3627 ; 2600,3628 2780,3628 ; 2629,3676 2748,3676 ; 2650,3675 2748,3675 ; 2668,3674 2750,3674 ; 2674,3673 2750,3673 ; 2687,3672 2751,3672 ; 2693,3671 2752,3671 ; 2700,3670 2753,3670 ; 2706,3669 2753,3669 ; 2711,3668 2754,3668 ; 2717,3667 2755,3667 ; 2720,3666 2755,3666 ; 2724,3665 2756,3665 ; 2726,3579 2788,3579 ; 2728,3664 2756,3664 ; 2730,3578 2788,3578 ; 2731,3663 2757,3663 ; 2734,3577 2788,3577 ; 2734,3662 2757,3662 ; 2737,3576 2788,3576 ; 2737,3637 2773,3637 ; 2737,3661 2758,3661 ; 2739,3575 2788,3575 ; 2740,3660 2758,3660 ; 2741,3574 2788,3574 ; 2741,3638 2771,3638 ; 2743,3573 2787,3573 ; 2743,3639 2769,3639 ; 2743,3659 2758,3659 ; 2745,3572 2787,3572 ; 2745,3640 2767,3640 ; 2746,3571 2786,3571 ; 2746,3658 2758,3658 ; 2747,3641 2765,3641 ; 2748,3570 2786,3570 ; 2748,3642 2763,3642 ; 2749,3569 2785,3569 ; 2749,3657 2758,3657 ; 2750,3568 2785,3568 ; 2750,3643 2759,3643 ; 2751,3567 2784,3567 ; 2752,3566 2784,3566 ; 2752,3656 2758,3656 ; 2753,3565 2783,3565 ; 2754,3564 2783,3564 ; 2755,3563 2783,3563 ; 2756,3562 2782,3562 ; 2757,3561 2782,3561 ; 2758,3560 2781,3560 ; 2759,3559 2781,3559 ; 2760,3557 2780,3557 ; 2760,3558 2780,3558 ; 2761,3556 2779,3556 ; 2762,3554 2778,3554 ; 2762,3555 2778,3555 ; 2763,3552 2777,3552 ; 2763,3553 2777,3553 ; 2764,3550 2776,3550 ; 2764,3551 2776,3551 ; 2765,3548 2774,3548 ; 2765,3549 2775,3549 ; 2766,3546 2773,3546 ; 2766,3547 2773,3547 ; 2767,3543 2770,3543 ; 2767,3544 2771,3544 ; 2767,3545 2772,3545

## Keep-outs
Keep-Out Layer:
  lines w9.84: 1806.71,2137 1806.71,4668 ; 1903.71,4767.03 6180.71,4768.38 ; 1906.71,2040.41 6183,2040.41 ; 6280.71,2140.41 6280.71,4671
  lines w10: 1806.71,2137 ccw(c1905.21,2138.5) 1906.71,2040 ; 1806.71,4667.03 cw(c1905.21,4668.53) 1903.71,4767.03 ; 6180.71,4768 cw(c6182.21,4669.5) 6280.71,4671 ; 6183,2040.41 ccw(c6181.5,2138.91) 6280,2140.41

## Other copper
Top Layer:
  text "-" at 5283,4620 h78.74
  text "5" at 5404,4603 h78.74
  text "3.3" at 5015,4602 h78.74
  text "+" at 1832,4367 h78.74
  text "-" at 1832,4186 h78.74
  text "+" at 1846,3880 h78.74
  text "-" at 1836,3687 h78.74
  text "Raptor" at 2513,3328 h59.06
  text "->" at 6108,2890 h78.74 r90
  text "NJIT" at 5782,2741 h78.74
  text "GD1" at 5829,2575 h78.74
  text "->" at 5528,2518 h39.37 r90

## Silkscreen, mask and mechanical layers (free items; w line width, h text height)
Top Overlay:
  lines w9.84: 3917.71,1815.41 3918.71,1814.41

## Dimensions
1806.71,2137 to 6280.71,2040.41 on Top Overlay
6280.71,4671 to 6183,2040.41 on Top Overlay

## Text inside footprints (layer, text, board x,y; h text height)
P6: Top Overlay "2" at 6206,2242 h50; Top Overlay "1" at 6207,2345 h50; Top Overlay "9" at 5628,2354 h50; Top Overlay "10" at 5593,2237 h50